# Altium PCB МПСУ.464421.2201.01.PcbDoc
Units mm, origin at the board's own origin, x right, y up, seen from the top; angles counter-clockwise.
Board outline 88.7 x 87.33 mm, 2 copper layers (Top Layer, Bottom Layer), stack 1.036 mm thick; 40 components, 18 nets, 100 pads, 167 vias.
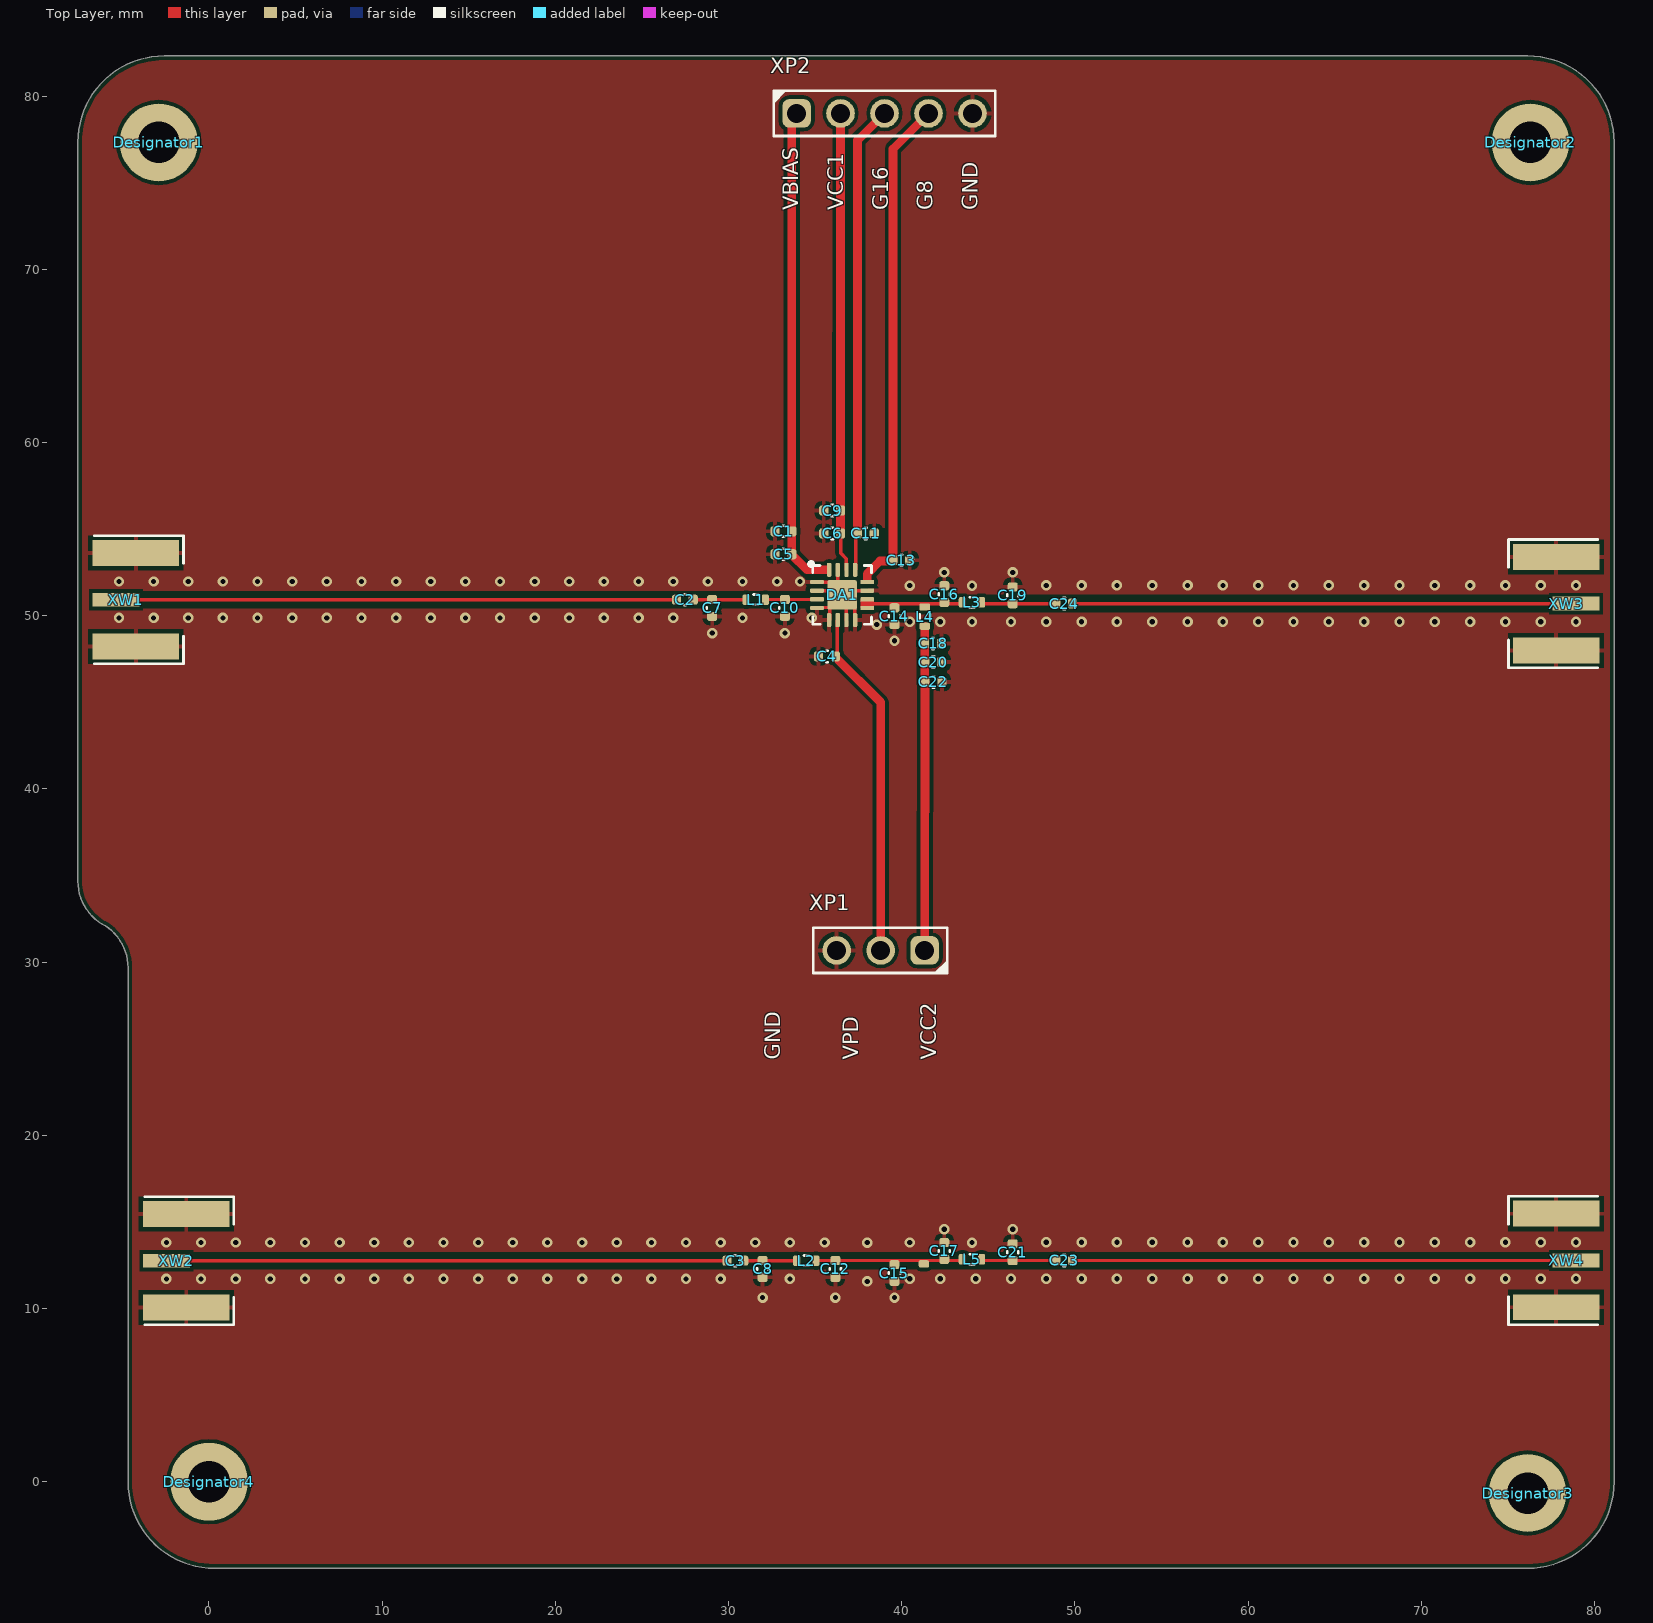
[diagram p0: Top Layer view]
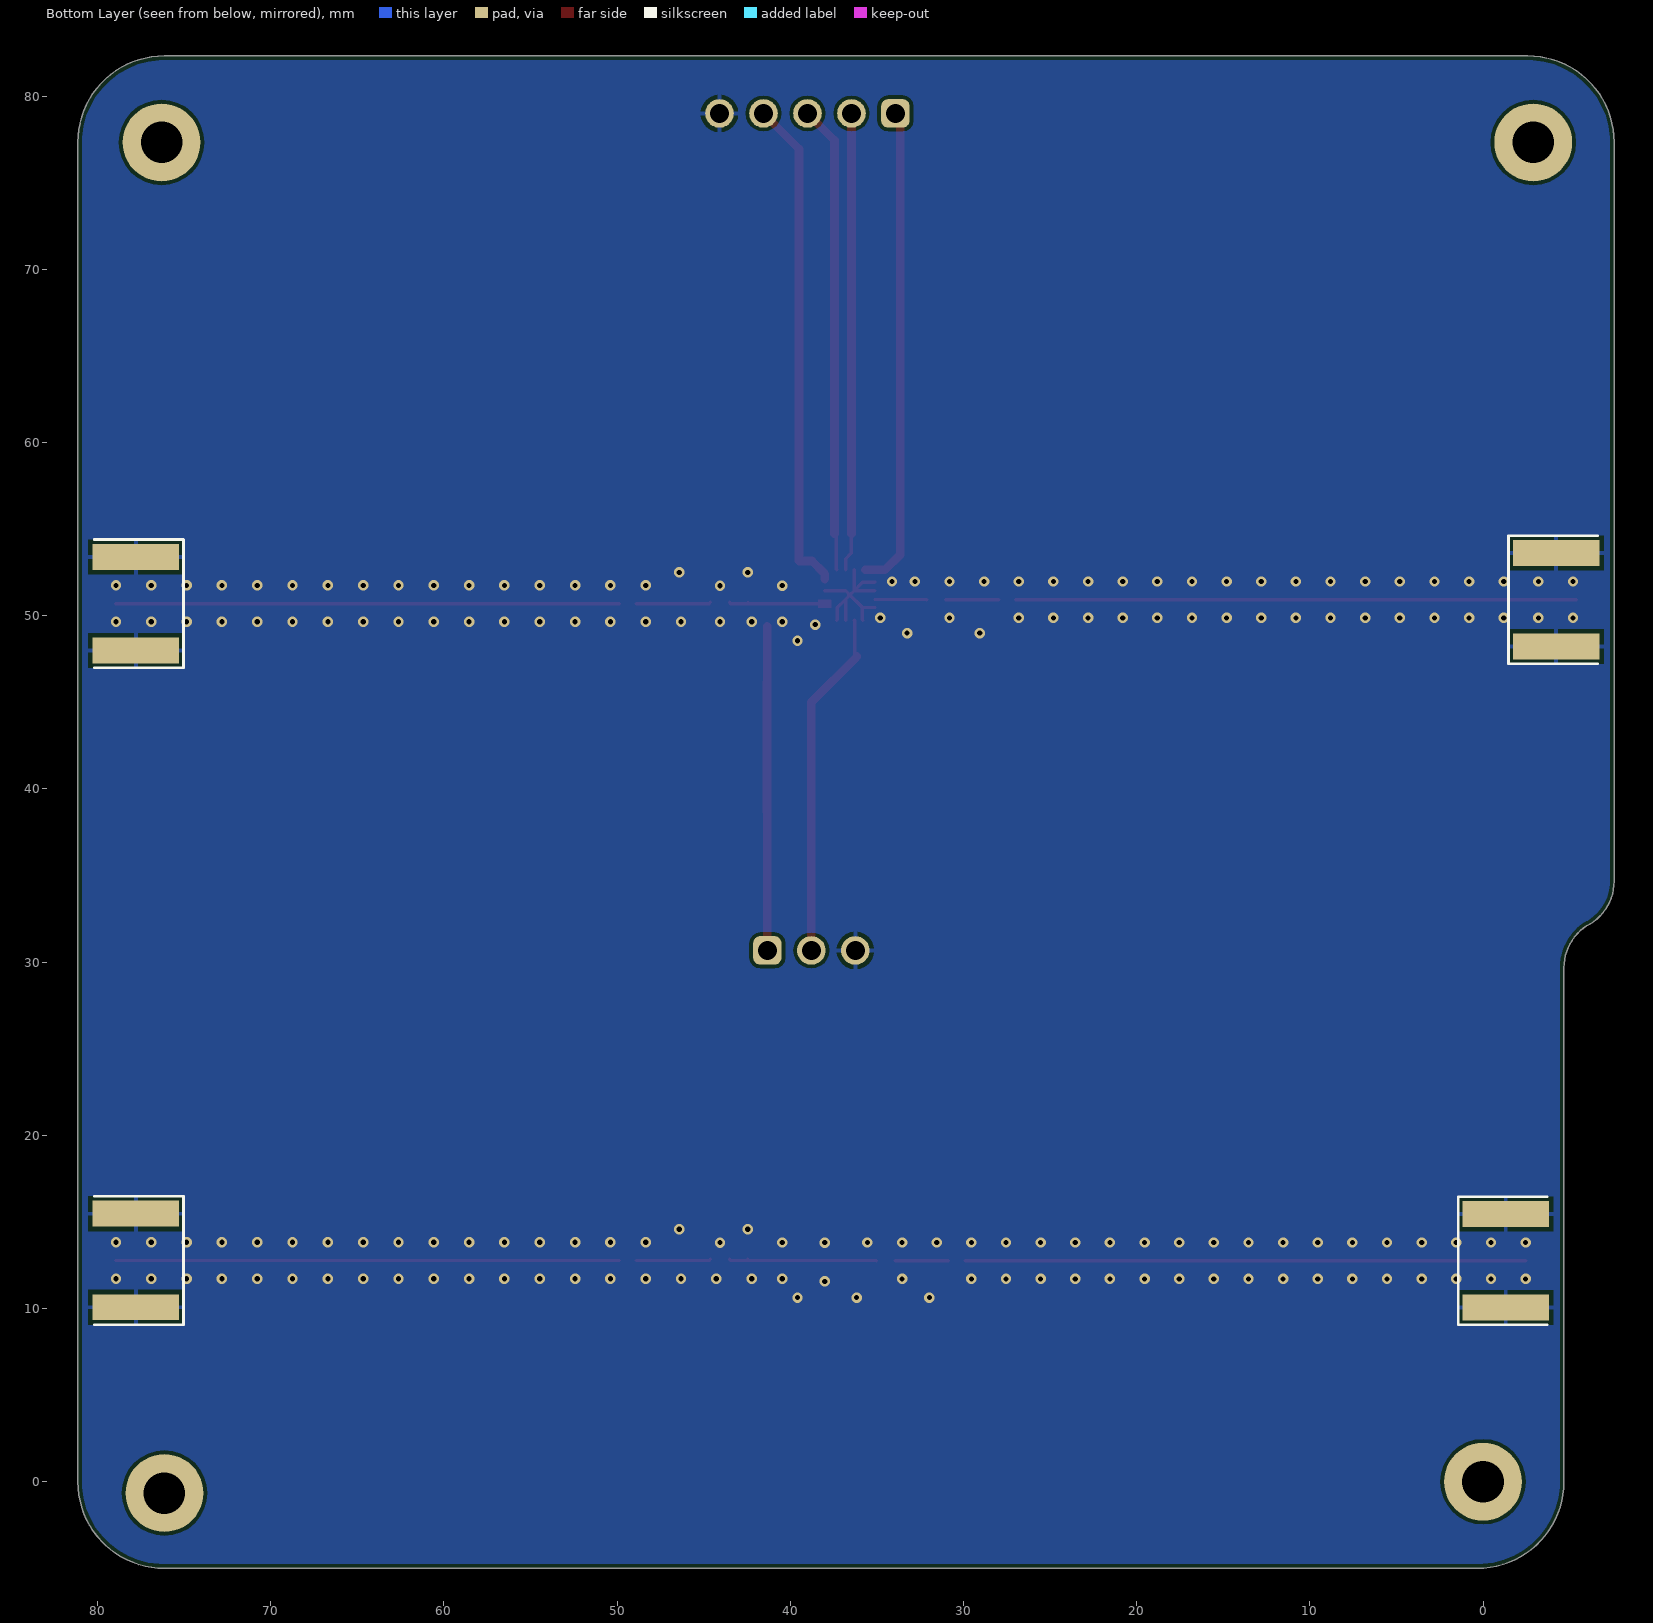
[diagram p1: Bottom Layer view, seen from below]
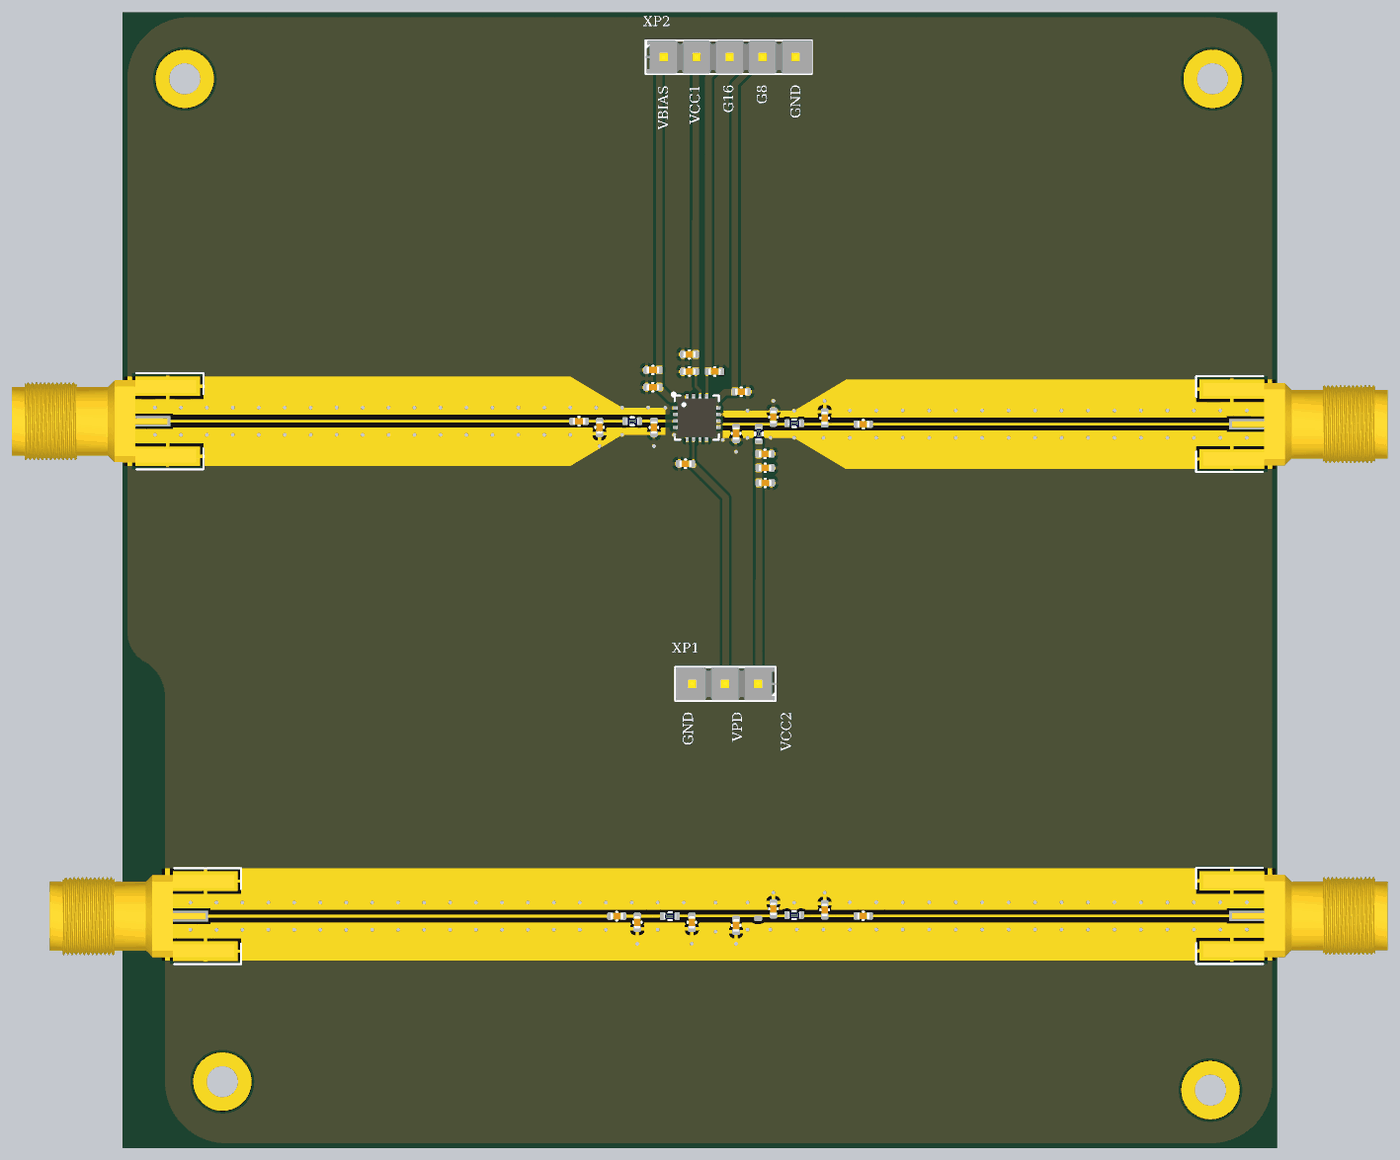
[diagram p2: 3D render of the assembled board from above, using the file's embedded part models]

## Layer stack, top to bottom
Top Solder: solder mask 0.0102, Solder Resist, Dk 3.5
Top Layer: signal copper 0.018
Dielectric 1: core 1, FR4, Dk 4.6
Bottom Layer: signal copper 0.018
Bottom Solder: solder mask 0.0102, Solder Resist, Dk 3.5

## Board outline
-4.671,29.675 ccw(c-7.571,29.675) -5.98,32.099 -5.986,32.09 cw(c-4.671,34.675) -7.571,34.675 -7.571,77.327 cw(c-2.571,77.326) -2.571,82.326 -2.571,82.325 76.13,82.325 cw(c76.129,77.325) 81.129,77.325 81.129,77.326 81.129,-0.001 cw(c76.129,0) 76.129,-5 0.328,-5 cw(c0.329,0) -4.671,0

## Design rules (kind name [scope] priority, off if disabled: settings)
BoardOutlineClearance SolderMask [OnSolderMask] p1: gap=0 ignorepadtopadclearanceinfootprint=FALSE except(0.25: Arc-CavityEdge Arc-SplitContinuation Track-CavityEdge Track-SplitContinuation SMDPad-CavityEdge SMDPad-SplitContinuation THPad-CavityEdge THPad-SplitContinuation Via-CavityEdge Via-SplitContinuation Fill-CavityEdge Fill-SplitContinuation Poly-CavityEdge Poly-SplitContinuation Region-CavityEdge Region-SplitContinuation Text-CavityEdge Text-SplitContinuation)
BoardOutlineClearance [All] p2: gap=0.25 ignorepadtopadclearanceinfootprint=FALSE
Clearance [All] p1: gap=0.2 ignorepadtopadclearanceinfootprint=FALSE
ComponentClearance [All] p1: gap=0.25 collisioncheckmode=3 verticalgap=0.25 showdistances=FALSE
DiffPairsRouting [All] p1: maxlimit=0.25 minlimit=0.25 mostfreqgap=0.25 toplayer_minwidth=0.2 toplayer_maxwidth=1 toplayer_prefwidth=0.4 bottomlayer_minwidth=0.2 bottomlayer_maxwidth=1 bottomlayer_prefwidth=0.4 maxuncoupledlength=10
HoleSize [All] p1: absolutevalues=TRUE maxlimit=8 minlimit=0.3 maxpercent=80.000 minpercent=20.000
HoleToHoleClearance [All] p1: gap=0.3 allowstackedmicrovias=TRUE
MinimumSolderMaskSliver [All] p1: minsoldermaskwidth=0.15
PlaneClearance [All] p1: clearance=0.5
PlaneConnect [All] p1: planeconnectstyle=Relief reliefexpansion=0.5 reliefentries=4 reliefconductorwidth=0.25 reliefairgap=0.25
PolygonConnect [All] p1: thpad.connectstyle=Relief thpad.reliefconductorwidth=0.25 thpad.reliefentries=4 thpad.polygonreliefangle="90 Angle" thpad.airgapwidth=0.25 smdpad.connectstyle=Relief smdpad.reliefconductorwidth=0.25 smdpad.reliefentries=4 smdpad.polygonreliefangle="90 Angle" smdpad.airgapwidth=0.25 via.connectstyle=Direct via.reliefconductorwidth=0.25 via.reliefentries=4 via.polygonreliefangle="90 Angle" via.airgapwidth=0.25
ReturnPath [All] p1: impedanceprofileid={2CF304FD-49DA-4276-8468-CD12DB598121} _gaplimit=0.5
RoutingCorners [All] p1: cornerstyle=45-Degree minsetback=2.5 maxsetback=2.5
RoutingVias [All] p1: holewidth=0.3 width=0.6 viastyle="Through Hole" minholewidth=0.3 minwidth=0.6 maxholewidth=1 maxwidth=1.5
SilkToSilkClearance [All] p1: silktosilkclearance=0.05
SilkToSolderMaskClearance [IsPad] p1: minsilkscreentomaskgap=0.05 clearancetoexposedcopper=TRUE
SolderMaskExpansion [All] p1: expansion=0.05 istentingtop=FALSE
UnRoutedNet [All] p1: checkbadconnections=TRUE
Width [All] p1: maxlimit=3 minlimit=0.2 preferedwidth=0.25
19 further rules are at their usual default settings.

## Classes and differential pairs
net class RF: RFOUT
component class "МПСУ.464414.22-01.01 Sheet1": C1 C2 C3 C4 C5 C6 C7 C8 C9 C10 C11 C12 C13 C14 C15 C16 C17 C18 C19 C20 C21 C22 C23 C24 DA1 L1 L2 L3 L4 L5 XP1 XP2 XW1 XW2 XW3 XW4

## Components (designator, comment, footprint, x,y, rotation, side; value= is the part's Value field where it differs from the comment)
C1 "100 пФ ± 5 % 50 В C0G 0402 GRM1555C1H101JZ01D" CAPC100X50X55L20N 33.169,54.875 r0 top value="100 пФ"
C2 "100 пФ ± 5 % 50 В C0G 0402 GRM1555C1H101JZ01D" CAPC100X50X55L20N 27.479,50.925 r0 top value="100 пФ"
C3 "100 пФ ± 5 % 50 В C0G 0402 GRM1555C1H101JZ01D" CAPC100X50X55L20N 30.391,12.762 r0 top value="100 пФ"
C4 "100 пФ ± 5 % 50 В C0G 0402 GRM1555C1H101JZ01D" CAPC100X50X55L20N 35.679,47.65 r0 top value="100 пФ"
C5 "1 мкФ ± 10 % 16 В X5R 0402 GRM155R61C105KA12D" CAPC100X50X55L20N 33.169,53.55 r0 top value="1 мкФ"
C6 "100 пФ ± 5 % 50 В C0G 0402 GRM1555C1H101JZ01D" CAPC100X50X55L20N 35.979,54.75 r0 top value="100 пФ"
C7 "DNP 0402" CAPC100X50X55L20N 29.054,50.45 r270 top value=DNP
C8 "DNP 0402" CAPC100X50X55L20N 31.966,12.287 r270 top value=DNP
C9 "1 мкФ ± 10 % 16 В X5R 0402 GRM155R61C105KA12D" CAPC100X50X55L20N 35.979,56.075 r0 top value="1 мкФ"
C10 "TBD 0402" CAPC100X50X55L20N 33.254,50.45 r270 top value=TBD
C11 "100 пФ ± 5 % 50 В C0G 0402 GRM1555C1H101JZ01D" CAPC100X50X55L20N 37.929,54.75 r180 top value="100 пФ"
C12 "TBD 0402" CAPC100X50X55L20N 36.166,12.287 r270 top value=TBD
C13 "100 пФ ± 5 % 50 В C0G 0402 GRM1555C1H101JZ01D" CAPC100X50X55L20N 39.979,53.2 r180 top value="100 пФ"
C14 "DNP 0402" CAPC100X50X55L20N 39.579,49.975 r270 top value=DNP
C15 "DNP 0402" CAPC100X50X55L20N 39.579,12.05 r90 top value=DNP
C16 "DNP 0402" CAPC100X50X55L20N 42.454,51.25 r270 top value=DNP
C17 "DNP 0402" CAPC100X50X55L20N 42.454,13.325 r90 top value=DNP
C18 "100 пФ ± 5 % 50 В C0G 0402 GRM1555C1H101JZ01D" CAPC100X50X55L20N 41.804,48.4 r0 top value="100 пФ"
C19 "TBD 0402" CAPC100X50X55L20N 46.404,51.175 r90 top value=TBD
C20 "100 пФ ± 5 % 50 В C0G 0402 GRM1555C1H101JZ01D" CAPC100X50X55L20N 41.819,47.325 r0 top value="100 пФ"
C21 "TBD 0402" CAPC100X50X55L20N 46.404,13.25 r90 top value=TBD
C22 "DNP 0402" CAPC100X50X55L20N 41.829,46.175 r0 top value=DNP
C23 "100 пФ ± 5 % 50 В C0G 0402 GRM1555C1H101JZ01D" CAPC100X50X55L20N 49.379,12.775 r0 top value="100 пФ"
C24 "100 пФ ± 5 % 50 В C0G 0402 GRM1555C1H101JZ01D" CAPC100X50X55L20N 49.379,50.7 r0 top value="100 пФ"
DA1 "RFPA0133TR7" QFN50P300X300X90_HS-17N 36.554,51.2 r0 top
Designator1 "Comment" M2_Hole -2.899,77.327 r0 top
Designator2 "Comment" M2_Hole 76.294,77.326 r0 top
Designator3 "Comment" M2_Hole 76.129,-0.653 r0 top
Designator4 "Comment" M2_Hole 0,0 r0 top
L1 "TBD 0402" INDC100X50X60L10N 31.574,50.925 r0 top value=TBD
L2 "TBD 0402" INDC100X50X60L10N 34.486,12.762 r0 top value=TBD
L3 "TBD 0402" INDC100X50X60L10N 44.054,50.77 r0 top value=TBD
L4 "100 нГн ± 5 % 200 мА 0402 LQG15HNR10J02D" INDC100X50X60L10N 41.329,49.95 r90 top value="100 нГн"
L5 "TBD 0402" INDC100X50X60L10N 44.054,12.845 r0 top value=TBD
XP1 "TSW-103-07-G-S" TSW-103-07-G-S 38.779,30.675 r180 top
XP2 "TSW-105-07-G-S" TSW-105-07-G-S 39.004,79 r0 top
XW1 "SMA84NDA-0000" SMA84NDA-0000 -6.721,50.925 r0 top
XW2 "SMA84NDA-0000" SMA84NDA-0000 -3.809,12.762 r0 top
XW3 "SMA84NDA-0000" SMA84NDA-0000 80.279,50.7 r180 top
XW4 "SMA84NDA-0000" SMA84NDA-0000 80.279,12.775 r180 top

## Footprints (in the part's own frame and the unit in brackets; to place one, negate y for a bottom-side part, rotate by r counter-clockwise, add the part's x,y. Pads: shape width x height; smd on the part's side, far side on the other; paste and mask are expansions set on the pad)
CAPC100X50X55L20N [mm] "Capacitor, Chip; 1.00 mm L X 0.50 mm W X 0.55 mm H body"
  rrect50% 0.53x0.58 smd: 1(-0.485,0) 2(0.485,0)
  silkscreen extent -0.05,-0.33 0.05,0.33, body extent -0.5,-0.25 0.5,0.25, height 0.55
INDC100X50X60L10N [mm] "Inductor, Chip; 1.00 mm L X 0.50 mm W X 0.60 mm H body"
  rrect50% 0.42x0.61 smd: 1(-0.555,0) 2(0.555,0)
  silkscreen extent -0.13,-0.3 0.13,0.3, body extent -0.5,-0.25 0.5,0.25, height 0.6
M2_Hole [mm]
  round 4.5 / inner round 3.4 / far side round 4.5 hole 2.4: 1(0,0)
  body extent -1.9,-1.9 1.9,1.9, height 1.3
QFN50P300X300X90_HS-17N [mm] "QFN, 16-Leads, Body 3,00x3,00mm, Pitch 0,50mm, Thermal Pad 1,73x1,73mm, IPC Medium Density"
  rrect50% 0.8x0.25 smd: 1(-1.45,0.75) 2(-1.45,0.25) 3(-1.45,-0.25) 4(-1.45,-0.75) 9(1.45,-0.75) 10(1.45,-0.25) 11(1.45,0.25) 12(1.45,0.75)
  rrect50% 0.25x0.8 smd: 5(-0.75,-1.45) 6(-0.25,-1.45) 7(0.25,-1.45) 8(0.75,-1.45) 13(0.75,1.45) 14(0.25,1.45) 15(-0.25,1.45) 16(-0.75,1.45)
  rrect10% 1.7x1.7 smd: 17(0,0)
  silkscreen extent -1.89,-1.7 1.7,1.89, body extent -1.55,-1.55 1.55,1.55, height 0.9
SMA84NDA-0000 [mm]
  rect 2.7x0.8 smd: 1(1.35,0)
  rect 5x1.5 all layers, no hole: 2(2.5,-2.7) 2(2.5,2.7)
  silkscreen extent 0.1,-3.7 5.25,3.7, body extent -9.5,-3.18 4.7,3.17, height 3.28
TSW-103-07-G-S [mm]
  rrect50% 1.65x1.65 hole 1.1: 1(-2.54,0)
  round 1.65 hole 1.1: 2(0,0) 3(2.54,0)
  silkscreen extent -3.84,-1.3 3.9,1.3, body extent -3.89,-1.27 3.86,1.27, height 8.38
TSW-105-07-G-S [mm]
  rrect50% 1.65x1.65 hole 1.1: 1(-5.08,0)
  round 1.65 hole 1.1: 2(-2.54,0) 3(0,0) 4(2.54,0) 5(5.08,0)
  silkscreen extent -6.4,-1.3 6.4,1.3, body extent -6.41,-1.27 6.42,1.27, height 8.38

## Part data
C1 C2 C3 C4 C6 C11 C13 C18 C20 C23 C24: library part "C 0402", "Capacitor 0402", Dielectric=C0G, Manufacturer=Murata, Package=0402, PartNumber=GRM1555C1H101JZ01D, Tolerance="5 %", 3D_Body=+, Category=Passive, Designer=Свидерский, Peak_Condition="50 В", Status=Approved, Subcategory=Capacitor
C5 C9: library part "C 0402", "Capacitor 0402", Dielectric=X5R, Manufacturer=Murata, Package=0402, PartNumber=GRM155R61C105KA12D, Tolerance="10 %", 3D_Body=+, Category=Passive, Designer=Свидерский, Peak_Condition="16 В", Status=Approved, Subcategory=Capacitor
C7 C8 C10 C12 C14 C15 C16 C17 C19 C21 C22: library part "C 0402", "Capacitor 0402", Package=0402, Tolerance="0 %", 3D_Body=+, Category=Passive, Designer=Свидерский, Notes=CP, Peak_Condition="0 В", Status=Approved, Subcategory=Capacitor
DA1: "380 to 960 MHz, 3 to 5V programmable gain high efficiency power amplifier", Manufacturer="RFD, Qorvo", Package="16-Lead QFN", 3D_Body=+, Category=IC, ComponentLink1Description="Техническое описание", ComponentLink1URL=Q:\Libs\Descriptions_PDF\RFPA0133_data_sheet.pdf, Designer=Лазба, PartNumber=RFPA0133TR7, Status=Check, Subcategory=VGA
L1 L2 L3 L5: library part "L 0402", "Inductor 0402", Package=0402, Tolerance="0 %", 3D_Body=+, Category=Passive, Designer=Свидерский, Notes=CP, Peak_Condition="0 А", Status=Approved, Subcategory=Inductor
L4: library part "L 0402", "Inductor 0402", Manufacturer=Murata, Package=0402, PartNumber=LQG15HNR10J02D, Tolerance="5 %", 3D_Body=+, Category=Passive, Designer=Свидерский, Peak_Condition="200 мА", Status=Approved, Subcategory=Inductor
XP1 XP2: "Вилка 2,54 мм", Manufacturer=Samtec, 3D_Body=+, Category=Connector, ComponentLink1Description="Техническое описание", ComponentLink1URL=Q:\Libs\Descriptions_PDF\tsw_th.pdf, Designer=Затонская, Pitch=2.54mm, Status=Check, Subcategory=Male, System=Connector
  XP1: PartNumber=TSW-103-07-G-S, Pins=1x3
  XP2: PartNumber=TSW-105-07-G-S, Pins=1x5
XW1 XW2 XW3 XW4: "SMA Jack P.C.B Mount (End Launch) 50 Ohm", Manufacturer=Jyebao, 3D_Body=+, Category=Connector, ComponentLink1Description="Техническое описание", ComponentLink1URL=Q:/Libs/Descriptions_PDF/SMA84NDA-0000.pdf, Designer=Карпов, PartNumber=SMA84NDA-0000, Pins=Coax, Pitch=3.5mm, Status=Approved, Subcategory=RF, System=Connector

## Free pads (board coordinates)
  rrect50% 0.61x0.42 smd: 11(41.279,12.58)

## Via types
v1: diameter 0.6, hole 0.3, Top Layer to Bottom Layer, tented both sides, 167 vias

## Nets (pads, with @x,y where several pads share a name; then routed paths per layer and width w, separated by ;. In a path a pad name is that pad's centre, name@x,y a point inside that pad or via, vN(x,y) a via of type N, cw(c..) or ccw(c..) an arc to the next point about the centre after c; other vN are vias at no path point)
GND: C1.1 C4.1 C5.1 C6.1 C7.2 C8.2 C9.1 C10.2 C11.1 C12.2 C13.1 C14.2 C15.1 C16.1 C17.2 C18.2 C19.2 C20.2 C21.2 C22.2 DA1.1 DA1.2 DA1.4 DA1.5 DA1.7 DA1.8 DA1.11 DA1.15 DA1.17 XP1.3 XP2.5 XW1.2 XW2.2 XW3.2 XW4.2 | length 11.2
  Top Layer w0.2: DA1.4 35.129,50.475 DA1.17@35.829,50.475 ; DA1.2 DA1.17@36.304,51.45 ; DA1.1 35.129,51.925 35.829,51.925 DA1.17@36.304,51.45 ; DA1.5 35.829,49.775 DA1.17@35.829,50.475 ; DA1.15 DA1.17@36.304,51.45 ; DA1.7 DA1.17@36.804,50.95 ; DA1.8 37.279,49.775 37.279,50.475 DA1.17@36.804,50.95 ; DA1.11 36.804,51.45 DA1.17 ; DA1.17@35.829,50.475 DA1.17 ; DA1.17@36.304,51.45 DA1.17 ; DA1.17 DA1.17@36.804,50.95
  other v1: 31.966,10.632 36.166,10.632 39.579,10.632 38.002,11.565 -2.459,11.712 -0.459,11.712 1.541,11.712 3.541,11.712 5.541,11.712 7.541,11.712 9.541,11.712 11.541,11.712 13.541,11.712 15.541,11.712 17.541,11.712 19.541,11.712 21.541,11.712 23.541,11.712 25.541,11.712 27.541,11.712 29.541,11.712 33.541,11.712 40.464,11.725 42.226,11.725 44.265,11.725 46.304,11.725 48.343,11.725 50.382,11.725 52.421,11.725 54.46,11.725 56.499,11.725 58.538,11.725 60.577,11.725 62.616,11.725 64.655,11.725 66.694,11.725 68.733,11.725 70.772,11.725 72.811,11.725 74.85,11.725 76.89,11.725 78.929,11.725 -2.459,13.812 -0.459,13.812 1.541,13.812 3.541,13.812 5.541,13.812 7.541,13.812 9.541,13.812 11.541,13.812 13.541,13.812 15.541,13.812 17.541,13.812 19.541,13.812 21.541,13.812 23.541,13.812 25.541,13.812 27.541,13.812 29.541,13.812 31.541,13.812 33.541,13.812 35.541,13.812 38.002,13.81 40.464,13.813 44.054,13.81 48.343,13.825 50.382,13.825 52.421,13.825 54.46,13.825 56.499,13.825 58.538,13.825 60.577,13.825 62.616,13.825 64.655,13.825 66.694,13.825 68.733,13.825 70.772,13.825 72.811,13.825 74.851,13.825 76.89,13.825 78.929,13.825 42.454,14.575 46.404,14.575 39.579,48.558 29.054,49 33.254,49 38.56,49.49 40.464,49.65 42.226,49.65 44.054,49.65 46.304,49.65 48.343,49.65 50.382,49.65 52.421,49.65 54.46,49.65 56.499,49.65 58.538,49.65 60.577,49.65 62.616,49.65 64.655,49.65 66.694,49.65 68.733,49.65 70.772,49.65 72.811,49.65 74.85,49.65 76.89,49.65 78.929,49.65 -5.196,49.875 -3.196,49.875 -1.196,49.875 0.804,49.875 2.804,49.875 4.804,49.875 6.804,49.875 8.804,49.875 10.804,49.875 12.804,49.875 14.804,49.875 16.804,49.875 18.804,49.875 20.804,49.875 22.804,49.875 24.804,49.875 26.804,49.875 30.804,49.875 34.804,49.875 40.464,51.738 44.054,51.735 48.343,51.75 50.382,51.75 52.421,51.75 54.46,51.75 56.499,51.75 58.538,51.75 60.577,51.75 62.616,51.75 64.655,51.75 66.694,51.75 68.733,51.75 70.772,51.75 72.811,51.75 74.851,51.75 76.89,51.75 78.929,51.75 -5.196,51.975 -3.196,51.975 -1.196,51.975 0.804,51.975 2.804,51.975 4.804,51.975 6.804,51.975 8.804,51.975 10.804,51.975 12.804,51.975 14.804,51.975 16.804,51.975 18.804,51.975 20.804,51.975 22.804,51.975 24.804,51.975 26.804,51.975 28.804,51.975 30.804,51.975 32.804,51.975 34.125,51.975 42.454,52.5 46.404,52.5
NetC2_1: C2.1 XW1.1 | length 32.4
  Top Layer w0.2: XW1.1 C2.1
NetC2_2: C2.2 C7.1 L1.1 | length 3.1
  Top Layer w0.2: C2.2 L1.1
NetC3_1: C3.1 XW2.1 | length 32.4
  Top Layer w0.2: XW2.1 C3.1
NetC3_2: C3.2 C8.1 L2.1 | length 3.1
  Top Layer w0.2: C3.2 L2.1
NetC12_1: C12.1 C15.2 C17.1 L2.2 L5.1 pad.11 | length 8.6
  Top Layer w0.2: L2.2 35.054,12.775 38.004,12.775 C17.1@42.389,12.775 ; C17.1 C17.1@42.389,12.775 ; L5.1 43.454,12.8 43.454,12.775 C17.1@42.389,12.775
NetC19_1: C19.1 C24.1 L3.2 | length 4.3
  Top Layer w0.2: L3.2 44.679,50.7 C24.1
NetC21_1: C21.1 C23.1 L5.2 | length 4.3
  Top Layer w0.2: L5.2 44.679,12.775 C23.1
NetC23_2: C23.2 XW4.1 | length 29.1
  Top Layer w0.2: C23.2 XW4.1
NetC24_2: C24.2 XW3.1 | length 29.1
  Top Layer w0.2: C24.2 XW3.1
RFIN: C10.1 DA1.3 L1.2 | length 3
  Top Layer w0.2: L1.2 32.141,50.938 35.091,50.938 DA1.3
RFOUT: C14.1 C16.2 DA1.9 DA1.10 L3.1 L4.2 | length 5.6
  Top Layer w0.2: 38.004,50.7 C16.2@42.389,50.7 ; C16.2 C16.2@42.389,50.7 ; L3.1 43.454,50.725 43.454,50.7 C16.2@42.389,50.7
RFPA_G8: C13.2 DA1.12 XP2.4 | length 28.8
  Top Layer w0.2: C13.2@39.494,53.175 C13.2
  Top Layer w0.5: 38.004,52.1 38.004,52.425 38.739,53.16 39.479,53.16 C13.2@39.494,53.175 ; C13.2 39.494,76.95 XP2.4
RFPA_G16: C11.2 DA1.13 XP2.3 | length 27.1
  Top Layer w0.2: DA1.13 37.329,52.675 37.329,54.635 C11.2
  Top Layer w0.5: C11.2 37.444,77.44 XP2.3
RFPA_VBIAS: C1.2 C5.2 DA1.16 XP2.1 | length 28
  Top Layer w0.2: 33.609,67.05 33.654,67.005 ; C5.2@33.654,53.525 C5.2
  Top Layer w0.5: C5.2@33.654,53.525 34.529,52.65 35.654,52.65 ; C5.2 33.654,78.73 XP2.1
RFPA_VCC2: C18.1 C20.1 C22.1 L4.1 XP1.1 | length 21
  Top Layer w0.2: C20.1@41.319,47.325 C18.1 ; C20.1 41.339,47.32 41.339,46.18 C22.1
  Top Layer w0.5: XP1.1 41.329,30.685 41.329,38.686 41.344,38.701 41.344,46.16 41.329,46.175 41.329,47.325 41.329,48.4 L4.1
RFPA_VPD: C4.2 DA1.6 XP1.2 | length 20.2
  Top Layer w0.2: C4.2 36.279,47.765 36.279,49.725 DA1.6
  Top Layer w0.5: C4.2 36.179,47.635 36.179,47.61 38.779,45.01 XP1.2
RFPA_VСС1: C6.2 C9.2 DA1.14 XP2.2 | length 26.5
  Top Layer w0.2: C6.2 36.464,53.64 36.804,53.3 DA1.14
  Top Layer w0.5: 36.464,66.343 XP2.2
  Top Layer w0.53: C6.2 C9.2 36.464,66.343
pads on no net: Designator1.1 Designator2.1 Designator3.1 Designator4.1

## Polygon pours and split planes (outlines as drawn)
GND on Top Layer "GND_L01_P000" (solid, pour order 0): -4.671,29.675 ccw(c-7.571,29.675) -5.98,32.099 -5.986,32.09 cw(c-4.671,34.675) -7.571,34.675 -7.571,77.327 cw(c-2.571,77.326) -2.571,82.326 -2.571,82.325 76.13,82.325 cw(c76.129,77.325) 81.129,77.325 81.129,77.326 81.129,-0.001 cw(c76.129,0) 76.129,-5 0.328,-5 cw(c0.329,0) -4.671,0
GND on Bottom Layer "GND_L02_P001" (solid, pour order 1): -4.671,29.675 ccw(c-7.571,29.675) -5.98,32.099 -5.986,32.09 cw(c-4.671,34.675) -7.571,34.675 -7.571,77.327 cw(c-2.571,77.326) -2.571,82.326 -2.571,82.325 76.13,82.325 cw(c76.129,77.325) 81.129,77.325 81.129,77.326 81.129,-0.001 cw(c76.129,0) 76.129,-5 0.328,-5 cw(c0.329,0) -4.671,0

## Other copper
Top Layer:
  rectangle net RFOUT: 37.604,50.45 38.404,50.95
  pour cut-out: -3.809,12.262 -3.809,13.264 80.279,13.264 80.279,12.262
  pour cut-out: -6.721,50.425 -6.721,51.426 35.091,51.426 35.091,50.425
  pour cut-out: 38.004,50.2 80.279,50.2 80.279,51.2 38.004,51.2

## Silkscreen, mask and mechanical layers (free items; w line width, h text height)
Top Overlay:
  text "VBIAS" at 34.325,73.4 h1.5 r90
  text "VCC1" at 36.908,73.4 h1.5 r90
  text "G16" at 39.495,73.4 h1.5 r90
  text "G8" at 42.081,73.4 h1.5 r90
  text "GND" at 44.667,73.4 h1.5 r90
  text "GND /  /  / VPD /  /  / VCC2" at 42.279,24.378 h1.5 r90
Top Solder:
  rectangle: 38.56,49.635 44.054,51.735
  rectangle: 48.054,47.25 81.129,54.15
  rectangle: 29.979,49.875 34.125,51.975
  rectangle: -7.571,47.475 26.804,54.375
  rectangle: -4.671,9.325 81.129,16.45
  region: 48.054,54.135 44.054,51.735 44.054,49.635 48.054,47.235
  region: 26.804,54.375 30.804,51.975 30.804,49.875 26.804,47.475
Board Outline:
  lines w0.25: -5.986,32.09 cw(c-4.671,34.675) -7.571,34.675 -7.571,77.327 cw(c-2.571,77.326) -2.571,82.326 76.13,82.325 cw(c76.129,77.325) 81.129,77.325 81.129,-0.001 cw(c76.129,0) 76.129,-5 0.254,-5 ; -5.98,32.099 cw(c-7.571,29.675) -4.671,29.675 -4.671,0 ccw(c0.329,0) 0.328,-5